# Altium PCB TMC_2208_TEST.PcbDoc
Units mil, origin at the board's own origin, x right, y up, seen from the top; angles counter-clockwise.
Board outline 880 x 945 mil, 2 copper layers (Top Layer, Bottom Layer), stack 61.855 mil thick; 22 components, 29 nets, 89 pads, 68 vias.
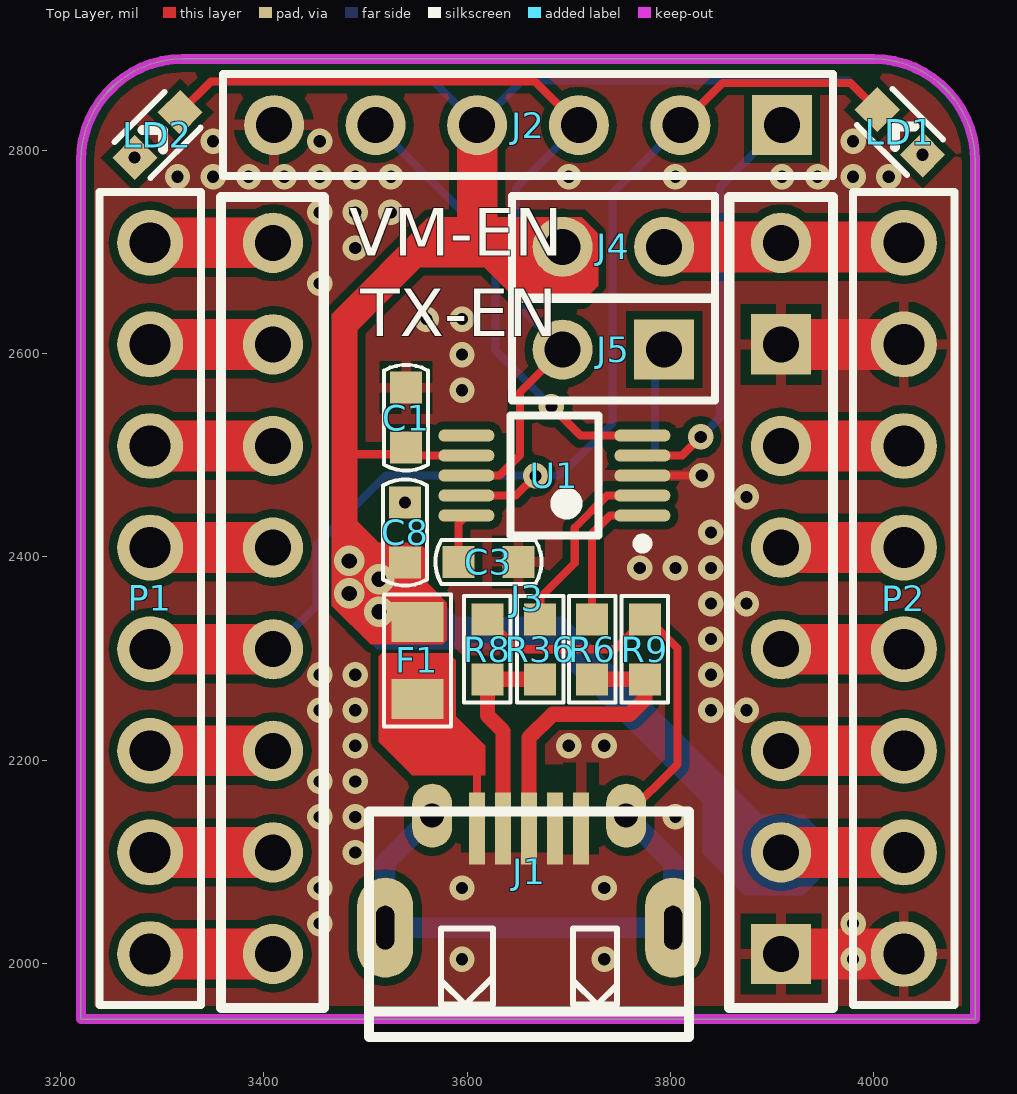
[diagram p0: Top Layer view]
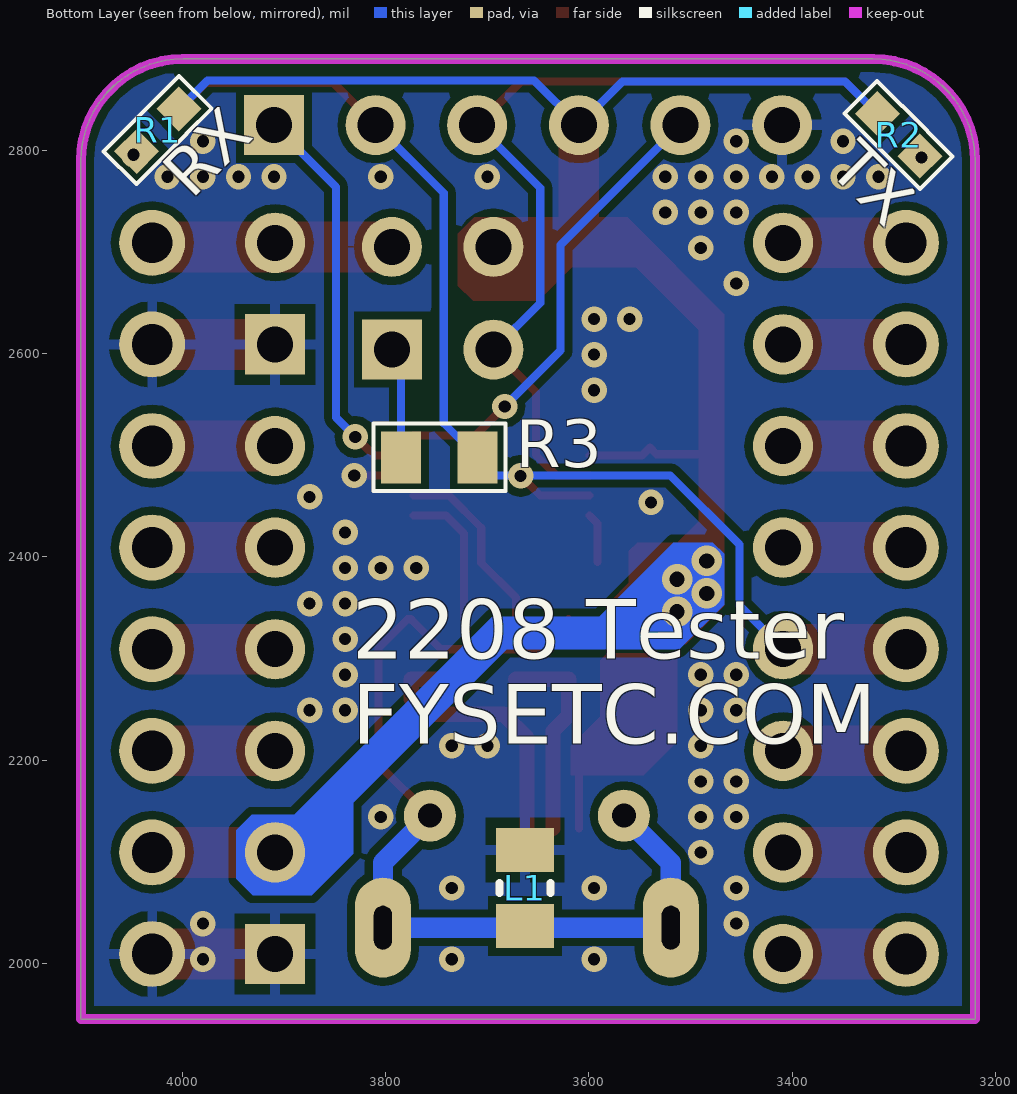
[diagram p1: Bottom Layer view, seen from below]

## Layer stack, top to bottom
Top Solder: solder mask 0.4, Solder Resist, Dk 3.5
Top Layer: signal copper 1.4
Dielectric 1: dielectric 59.0551, FR-4, Dk 4.8
Bottom Layer: signal copper 1.4
Bottom Solder: solder mask 0.4, Solder Resist, Dk 3.5

## Board outline
3220,1945 3220,2790 cw(c3320,2790) 3320,2890 4000,2890 cw(c4000,2790) 4100,2790 4100,1945

## Design rules (kind name [scope] priority, off if disabled: settings)
Clearance [All] p1: gap=8 ignorepadtopadclearanceinfootprint=TRUE
DiffPairsRouting [All] p1: maxlimit=10 minlimit=10 mostfreqgap=10 toplayer_minwidth=15 toplayer_maxwidth=15 toplayer_prefwidth=15 bottomlayer_minwidth=15 bottomlayer_maxwidth=15 bottomlayer_prefwidth=15 maxuncoupledlength=500
PolygonConnect [All] p1: thpad.connectstyle=Relief thpad.reliefconductorwidth=10 thpad.reliefentries=4 thpad.polygonreliefangle="90 Angle" thpad.airgapwidth=10 smdpad.connectstyle=Relief smdpad.reliefconductorwidth=10 smdpad.reliefentries=4 smdpad.polygonreliefangle="90 Angle" smdpad.airgapwidth=10 via.connectstyle=Direct via.reliefconductorwidth=10 via.reliefentries=4 via.polygonreliefangle="90 Angle" via.airgapwidth=10
RoutingVias [All] p1: holewidth=28 width=50 viastyle="Through Hole" minholewidth=28 minwidth=50 maxholewidth=28 maxwidth=50
SolderMaskExpansion [All] p1: expansion=4
Width [All] p1: maxlimit=50 minlimit=6 preferedwidth=8
29 further rules are at their usual default settings.

## Classes and differential pairs
differential pair USB: +USB_P -USB_N

## Components (designator, comment, footprint, x,y, rotation, side; value= is the part's Value field where it differs from the comment)
C1 "100nF" CAP0603 3540,2537 r90 top
C3 "100nF" CAP0603 3621,2395 r180 top
C8 "10uF" CAP0603 3539,2424 r270 top
F1 "Multifuse" RES0805 3551,2298 r90 top value=0.5A
J1 "Header 9" MicroUSB 3665,2035 r0 top
J2 "Header 6" HDR1X6 3910,2825 r180 top
J3 "TMC2208_BreakOut" TMC2208 3709,2109.06 r0 top locked
J4 "Header 2" HDR1X2#1 3694,2705 r0 top
J5 "Header 2" HDR1X2#2 3794,2604 r180 top
L1 "Bead" L0805 3663,2074 r270 bottom
LD1 "LED_0603" LED0603 4026,2818 r45 top
LD2 "LED_0603" LED0603 3295.27,2815.27 r315 top
P1 "Header 8" "Header 1X8" 3288.06,2709.06 r270 top
P2 "Header 8" "Header 1X8" 4029.94,2709.06 r270 top
R1 "1K" RES0603 4024.46,2820 r315 bottom
R2 "1K" RES0603 3295.27,2815.27 r225 bottom
R3 "1K" RES0805 3747.28,2498 r180 bottom
R6 "22E" RES0603 3723,2309 r90 top
R8 "20V" RES0603 3620,2309 r270 top
R9 "20V" RES0603 3775,2309 r270 top
R36 "22E" RES0603 3672,2309 r90 top
U1 "CH340E" MSOP10 3686,2480 r180 top

## Footprints (in the part's own frame and the unit in brackets; to place one, negate y for a bottom-side part, rotate by r counter-clockwise, add the part's x,y. Pads: shape width x height; smd on the part's side, far side on the other; paste and mask are expansions set on the pad)
CAP0603 [mm]
  rect 0.8x0.8 smd mask+0.1: 1(-0.75,0) 2(0.75,0)
  silkscreen extent -1.32,-0.55 1.32,0.55, body extent -0.8,-0.4 0.8,0.4, height 0.9
HDR1X2#1 [mm] "Connector; Header; 2 Position"
  round 1.5 hole 0.9: 1(0,0) 2(2.54,0)
  silkscreen extent -1.27,-1.27 3.81,1.27
HDR1X2#2 [mm] "Connector; Header; 2 Position"
  rect 1.5x1.5 hole 0.9: 1(0,0)
  round 1.5 hole 0.9: 2(2.54,0)
  silkscreen extent -1.27,-1.27 3.81,1.27
HDR1X6 [mm] "Connector; Header; 6 Position"
  rect 1.5x1.5 hole 0.9: 1(0,0)
  round 1.5 hole 0.9: 2(2.54,0) 3(5.08,0) 4(7.62,0) 5(10.16,0) 6(12.7,0)
  silkscreen extent -1.27,-1.27 13.97,1.27
"Header 1X8" [mm]
  round 1.65 hole 1.02: 1(0,0) 2(2.54,0) 3(5.08,0) 4(7.62,0) 5(10.16,0) 6(12.7,0) 7(15.24,0) 8(17.78,0)
  silkscreen extent -1.27,-1.27 19.05,1.27, body extent -1.17,-1.25 19.05,1.25, height 8.2
L0805 [mm]
  rect 1.1x1.45 smd: 1(-0.95,0) 2(0.95,0)
  silkscreen extent -0.13,-0.64 0.13,0.64, body extent -1,-0.6 1,0.65, height 0.44
LED0603 [mm]
  rect 0.8x0.8 smd: 1(0,0.8) 2(0,-0.8)
  silkscreen extent -0.63,-0.89 0.64,0.89, body extent -0.37,-0.81 0.36,0.84, height 0.68
MicroUSB [mm]
  rect 0.4x1.8 smd: 1(-1.4,2.481) 2(-0.75,2.481) 3(-0.1,2.481) 4(0.55,2.481) 5(1.2,2.481)
  oval 1.4x2.5 hole 0.45 slot 1.092 at 90 deg: 6(-3.698,0) 7(3.5,0)
  oval 1x1.6 / inner oval 1.3x1.6 / far side rrect100% 1.3x1.3 hole 0.6: 8(-2.523,2.8) 9(2.327,2.8)
  silkscreen extent -4.1,-2.73 3.9,2.9, body extent -4.09,-2.6 3.89,2.83, height 2.73
MSOP10 [mm] "TSSOP, 10-Leads, Body 3.00x3.00mm, Pitch 0.50mm, IPC Medium Density"
  oval 1.4x0.3 smd: 1(-2.2,1) 2(-2.2,0.5) 3(-2.2,0) 4(-2.2,-0.5) 5(-2.2,-1) 6(2.2,-1) 7(2.2,-0.5) 8(2.2,0) 9(2.2,0.5) 10(2.2,1)
  silkscreen extent -2.33,-1.5 1.1,1.82, body extent -2.45,-1.5 2.45,1.5, height 1.1
RES0603 [mm]
  rect 0.8x0.8 smd mask+0.1: 1(-0.75,0) 2(0.75,0)
  silkscreen extent -1.33,-0.58 1.33,0.58, body extent -0.8,-0.4 0.8,0.4, height 0.45
RES0805 [mm]
  rect 1x1.3 smd: 1(-0.958,0) 2(0.958,0)
  silkscreen extent -1.65,-0.84 1.65,0.84, body extent -1.03,-0.62 0.97,0.63, height 0.44
TMC2208 [mm]
  round 1.51 hole 0.9: 1(-7.62,15.24) 2(-7.62,12.7) 3(-7.62,10.16) 4(-7.62,7.62) 5(-7.62,5.08) 6(-7.62,2.54) 7(-7.62,0) 8(-7.62,-2.54) 10(5.08,0) 11(5.08,2.54) 12(5.08,5.08) 13(5.08,7.62) 14(5.08,10.16) 16(5.08,15.24)
  rect 1.51x1.51 hole 0.9: 9(5.08,-2.54) 15(5.08,12.7)
  silkscreen extent -8.92,-3.89 6.38,16.38, body extent -8.83,-3.81 6.27,16.51, height 8.5

## Part data
C1 C8: library part Library_CAP-0002, "RO X7R 100nF 10% 50V 0603", Faber ItemCode=45068500, ID=Library_CAP-0002
C3: library part Library_CAP-0006, "RO X5R 1uF 10% 10V 0603", Faber ItemCode=36310600, ID=Library_CAP-0006
F1: library part Library_FUSE-0001, "RO ZEK MULTI 500MA SMD 1812 MF-MSMF050-2 BOURNS", Faber ItemCode=35502800, ID=Library_FUSE-0001, Info="MULTIFUSE, SMD, 0.5A", Mfg=BOURNS, Mfg code=MF-MSMF050-2
J1: "Header, 9-Pin", LatestRevisionDate=17-Jul-2002, LatestRevisionNote="Re-released for DXP Platform.", Publisher="Altium Limited"
J2: "Header, 6-Pin", LatestRevisionDate=17-Jul-2002, LatestRevisionNote="Re-released for DXP Platform.", Publisher="Altium Limited"
J4 J5: "Header, 2-Pin", LatestRevisionDate=17-Jul-2002, LatestRevisionNote="Re-released for DXP Platform.", Publisher="Altium Limited"
L1: library part Library_COIL-0001, "RO FERRIET BLM21PG221SN1D  0805", Faber ItemCode=36571200, ID=Library_COIL-0001
P1 P2: "Header, 8-Pin", LatestRevisionDate=17-Jul-2002, LatestRevisionNote="Re-released for DXP Platform.", Publisher="Altium Limited"
R1 R2 R3 R6 R36: library part Library_RES-0007, "RO RES 22E0 1% 0,063W 0603", Faber ItemCode=36108300, ID=Library_RES-0007, Info=Resistor
R8 R9: library part Library_RES-0012, "RO VDR 0603 CG0603MLC-05E", Faber ItemCode=36925900, ID=Library_RES-0012, Info=Varistor, Mfg=BOURNS, Mfg code=CG0603MLC-05E

## Via types
v1: diameter 25, hole 12, Top Layer to Bottom Layer, tented both sides, 64 vias
v2: diameter 30, hole 15, Top Layer to Bottom Layer, tented both sides, 4 vias

## Nets (pads, with @x,y where several pads share a name; then routed paths per layer and width w, separated by ;. In a path a pad name is that pad's centre, name@x,y a point inside that pad or via, vN(x,y) a via of type N, cw(c..) or ccw(c..) an arc to the next point about the centre after c; other vN are vias at no path point)
3V3: C3.2 U1.10 | length 48.9
  Top Layer w8: C3.2 3591.47,2432.72 U1.10
CTS: J2.5 U1.5 | length 450.1
  Top Layer w8: v1(3683,2548) 3711.63,2519.37 U1.5
  Bottom Layer w8: J2.5 3628,2707 3628,2603 v1(3683,2548)
GND: C1.2 C3.1 C8.1 J1.5 J2.6 J3.9 J3.15 L1.1 P2.2 P2.8 U1.3 | length 311.8
  Top Layer w8: U1.3 v1(3831,2480)
  Top Layer w50: J3.9 P2.8 P2.8@4034,2005 ; J3.15 P2.2 P2.2@4034,2605
  other v1: 3595,2004 3735,2004 3980,2004 3455,2039 3980,2039 3455,2074 3595,2074 3735,2074 3490,2109 3455,2144 3490,2144 3805,2144 3455,2179 3490,2179 3490,2214 3700,2214 3735,2214 3455,2249 3490,2249 3840,2249 3875,2249 3455,2284 3490,2284 3840,2284 3840,2319 3840,2354 3875,2354 3770,2389 3805,2389 3840,2389 3840,2424 3539,2453.53 3875,2459 3595,2564 3595,2599 3560,2634 3595,2634 3455,2669 3490,2704 3455,2739 3490,2739 3525,2739 3315,2774 3350,2774 3385,2774 3420,2774 3455,2774 3490,2774 3525,2774 3700,2774 3805,2774 3910,2774 3945,2774 3980,2774 4015,2774 3350,2809 3455,2809 3980,2809
NetF1_1: F1.1 J1.1 | length 181.1
  Top Layer w8: 3558,2283.28 3558,2258 3609.88,2206.12 ; J1.1 3609.88,2215.12
NetJ1_6: J1.6 J1.7 J1.8 J1.9 L1.2 R8.1 R9.1 | length 951.1
  Top Layer w8: R8.1 3649.52,2309 3745.48,2309 R9.1 3778.47,2338.53 3807,2310 3807,2195.62 J1.9
  Bottom Layer w20: J1.8 3519.41,2098.98 J1.6 J1.7 3802.8,2099.05 J1.9
NetJ3_1: J3.1 P1.1 | length 125
  Top Layer w50: P1.1@3284,2705 P1.1@3288.06,2705 ; P1.1 J3.1
NetJ3_2: J3.2 P1.2 | length 125
  Top Layer w50: P1.2@3284,2605 P1.2@3288.06,2605 ; P1.2 J3.2
NetJ3_3: J3.3 P1.3 | length 126.7
  Top Layer w50: P1.3@3284,2505 P1.3 J3.3
NetJ3_4: J3.4 P1.4 | length 126.7
  Top Layer w50: P1.4@3284,2405 P1.4 J3.4
NetJ3_6: J3.6 P1.6 | length 126.7
  Top Layer w50: P1.6@3284,2205 P1.6 J3.6
NetJ3_7: J3.7 P1.7 | length 126.7
  Top Layer w50: P1.7@3284,2105 P1.7 J3.7
NetJ3_8: J3.8 P1.8 | length 126.7
  Top Layer w50: P1.8@3284,2005 P1.8 J3.8
NetJ3_11: J3.11 P2.6 | length 126.7
  Top Layer w50: J3.11 P2.6 P2.6@4034,2205
NetJ3_12: J3.12 P2.5 | length 126.7
  Top Layer w50: J3.12 P2.5 P2.5@4034,2305
NetJ3_13: J3.13 P2.4 | length 126.7
  Top Layer w50: J3.13 P2.4 P2.4@4034,2405
NetJ3_14: J3.14 P2.3 | length 126.7
  Top Layer w50: J3.14 P2.3 P2.3@4034,2505
NetJ5_1: J5.1 R3.1 | length 109.7
  Bottom Layer w8: R3.1 3785,2595 J5.1
NetLD1_2: LD1.2 R1.2
  other v1: 4048.27,2795.73
NetLD2_2: LD2.2 R2.2
  other v1: 3272.65,2792.94
NetR6_2: R6.2 U1.1 | length 141.4
  Top Layer w8: R6.2 3723,2423 3740.63,2440.63 U1.1
NetR36_2: R36.2 U1.2 | length 188.2
  Top Layer w8: R36.2@3669,2341.53 R36.2 3672,2360 3706,2394 3706,2428.63 3737.69,2460.31 U1.2
RTS: J2.1 U1.4 | length 405.1
  Top Layer w8: U1.4 3811.68,2499.68 v1(3830,2518)
  Bottom Layer w8: v1(3830,2518) 3849,2537 3849,2764 J2.1
RX: J2.2 J3.5 LD1.1 P1.5 R3.2 U1.9 | length 1207
  Top Layer w8: U1.9 3647.94,2460.31 v1(3667.31,2479.69) ; J2.2 3851.53,2866.53 3977.47,2866.53 LD1.1
  Top Layer w50: P1.5@3284,2305 P1.5 J3.5
  Bottom Layer w8: J3.5 3452,2352.06 3452,2412 3520,2480 3691.57,2480 R3.2 3743,2531.43 3743,2758 J2.2
TNOW: U1.6
TX: J2.3 J5.2 LD2.1 U1.8 | length 870.9
  Top Layer w8: LD2.1 3348,2868 3667,2868 J2.3 ; U1.8 3632,2480 3652,2500 3652,2562 J5.2
  Bottom Layer w8: J5.2 3648,2650 3648,2763 J2.3
USB_N: J1.2 R8.2 R36.1 | length 205.2
  Top Layer w15: J1.2 3635.47,2228.53 3620,2244 R8.2 R36.1
USB_P: J1.3 R6.1 R9.2 | length 290.5
  Top Layer w15: J1.3 3661.06,2222.06 3684,2245 3760,2245 3775,2260 R9.2 R6.1
VDDIO: C1.1 C8.2 F1.2 J2.4 J3.10 J4.1 P2.7 R1.1 R2.1 U1.7 | length 1102.3
  Top Layer w8: 3485,2501 3533.53,2501 C1.1 3547.79,2499.68 U1.7
  Top Layer w40: 3610,2718 J2.4
  Top Layer w50: J3.10 P2.7 P2.7@4034,2105
  Bottom Layer w8: R2.1 3348,2868 3567,2868 J2.4 3654,2869 3975.46,2869 R1.1
  other v2: 3513.35,2346 3484,2364 3513.35,2378 3484,2396
VMOT: J3.16 J4.2 P2.1 | length 240
  Top Layer w50: J4.2 P2.1@4034,2705
pads on no net: J1.4

## Polygon pours and split planes (outlines as drawn)
GND on Top Layer "Top Overlay-No Net" (solid, pour order 0): 3220,1945 4100,1945 4100,2883 4081,2902 4073,2894 3213,2894
GND on Bottom Layer "GND_L02_P002" (solid, pour order 2): 3220,1945 4100,1945 4098,1947 4098,2883 4091,2890 3220.98,2890

## Keep-outs
Keep-Out Layer:
  the board outline again, w10

## Other copper
Top Layer:
  region net VDDIO: 3562,2734 3467,2639 3467,2395.12 3513,2405.59 3513,2414 3492,2435 3492,2623 3554,2685 3617,2685 3650,2652 3714,2652 3729,2667 3729,2718 3713,2734
  region net VDDIO: 3467,2403 3478,2414 3552.65,2414 3560.65,2406 3560.65,2374.35 3580,2355 3580,2318 3576,2314 3505,2314 3467,2352
  region net NetF1_1: 3513,2302 3516,2305 3582,2305 3589,2298 3589,2243 3618,2214 3618,2185 3546,2185 3513,2218
Bottom Layer:
  region net VDDIO: 3478,2414 3467,2403 3467,2353 3511,2309 3681,2309 3832,2158 3832,2108 3873,2067 3931,2067 3947,2083 3947,2131 3932,2146 3890,2146 3695,2341 3590,2341 3517,2414

## Silkscreen, mask and mechanical layers (free items; w line width, h text height)
Top Overlay:
  text "VM-EN" at 3484,2681 h80
  text "TX-EN" at 3494.88,2602 h80
Bottom Overlay:
  text "TX" at 3377,2770 h80 r45
  text "RX" at 3980,2740 h80 r315
  text "2208 Tester" at 3833,2280.3 h100
  text "FYSETC.COM" at 3833,2197 h100

## Text inside footprints (layer, text, board x,y; h text height)
J3: Mechanical 15 "DIR" at 3451.13,1983.9 h78.74; Mechanical 15 "STEP" at 3451.13,2083.06 h78.74; Mechanical 15 "CLK" at 3451.13,2183.17 h78.74; Mechanical 15 "PDN" at 3451.13,2283.28 h78.74; Mechanical 15 "NC" at 3451.13,2383.38 h78.74; Mechanical 15 "MS2" at 3451.13,2483.49 h78.74; Mechanical 15 "MS1" at 3451.13,2583.6 h78.74; Mechanical 15 "EN" at 3451.13,2684.65 h78.74; Mechanical 15 "GND" at 3716.28,1984.85 h78.74; Mechanical 15 "VIO" at 3747.41,2085.64 h78.74; Mechanical 15 "1B" at 3784.96,2185.18 h78.74; Mechanical 15 "1A" at 3781.75,2285.02 h78.74; Mechanical 15 "2A" at 3777.96,2384.85 h78.74; Mechanical 15 "2B" at 3781.16,2484.69 h78.74; Mechanical 15 "GND" at 3716.28,2583.87 h78.74; Mechanical 15 "VM" at 3765.42,2684.65 h78.74